# Altium PCB PCB_ADC 2.PcbDoc
Units mm, origin at the board's own origin, x right, y up, seen from the top; angles counter-clockwise.
Board outline 50.55 x 47.88 mm, 2 copper layers (Top Layer, Bottom Layer); 22 components, 14 nets, 52 pads, 0 vias.
Unrouted connection lines stored in the file: 38.
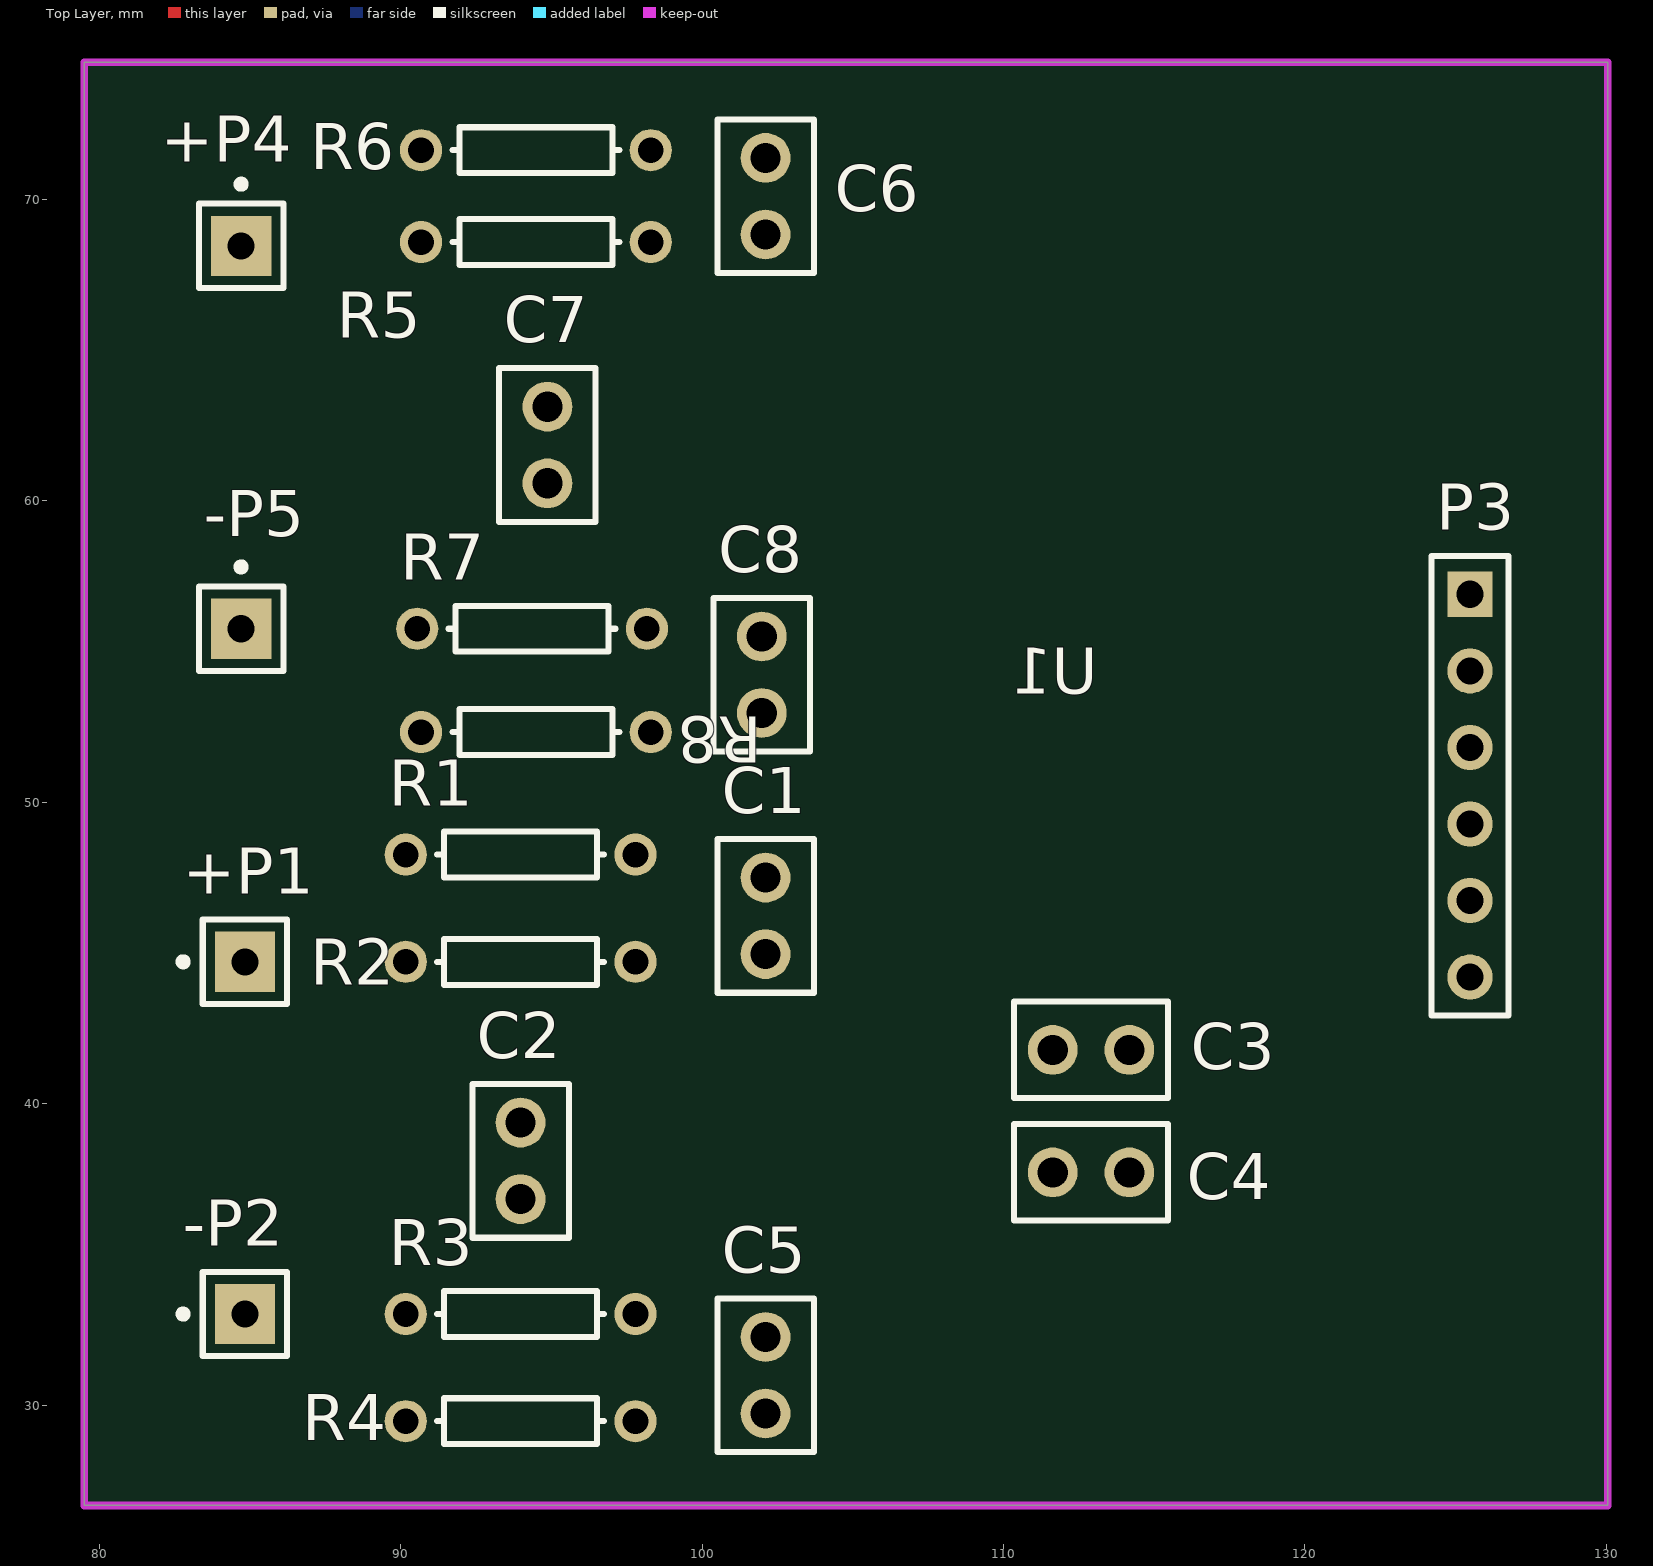
[diagram p0: Top Layer view]
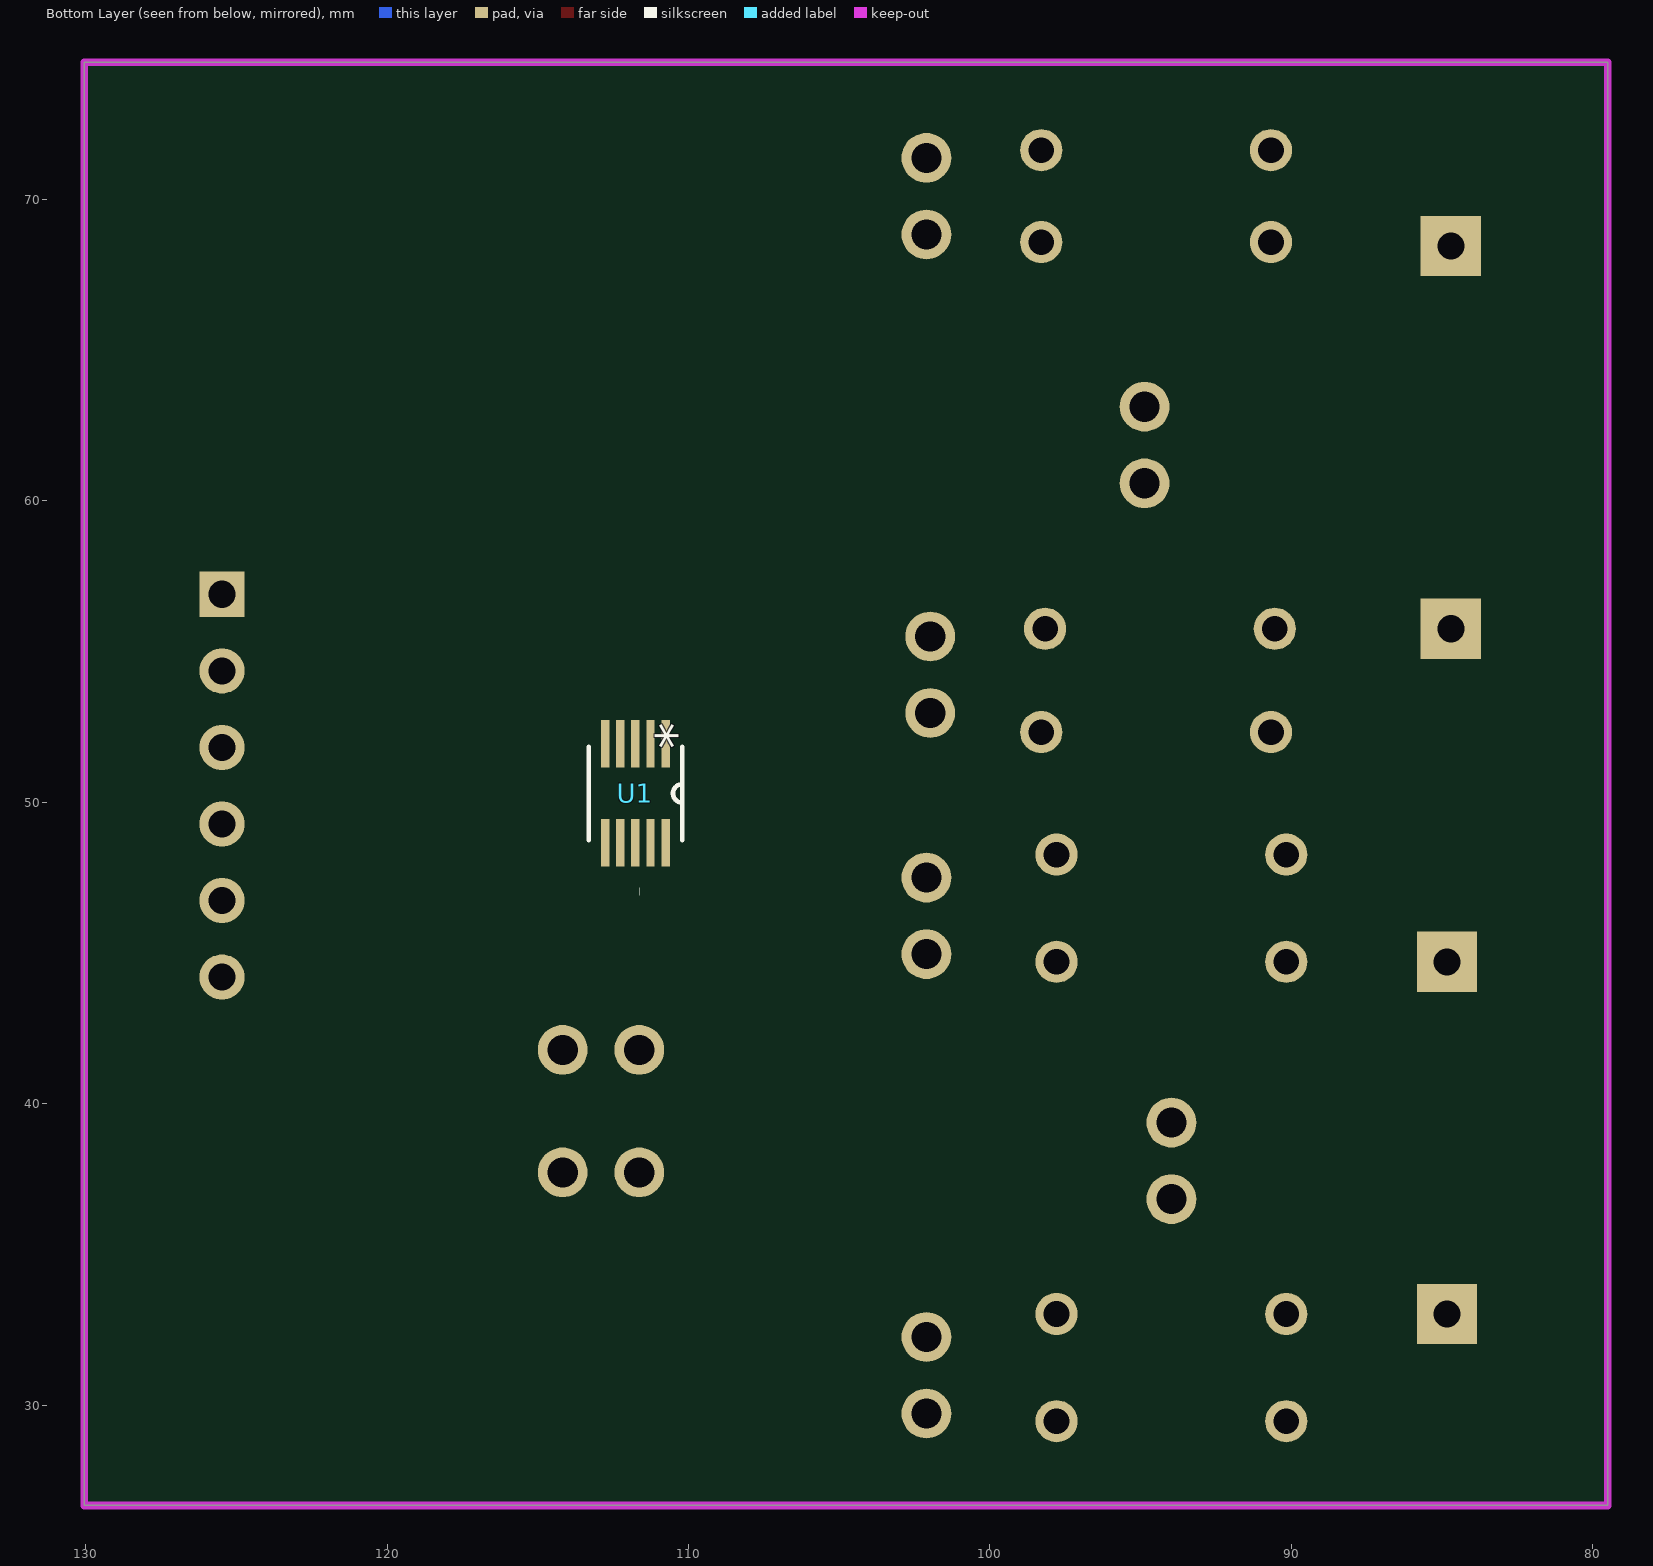
[diagram p1: Bottom Layer view, seen from below]

## Layer stack, top to bottom
Top Layer: signal copper 0.0356
Dielectric: dielectric 0.32, FR-4, Dk 4.8
Bottom Layer: signal copper 0.0356

## Board outline
79.502,26.67 79.502,74.549 130.048,74.549 130.048,26.67

## Design rules (kind name [scope] priority, off if disabled: settings)
Clearance [All] p1: gap=0.2
PolygonConnect [All] p1: connectstyle=Relief reliefconductorwidth=0.254 reliefentries=4 polygonreliefangle="90 Angle"
RoomDefinition EsquematicoAD [InComponentClass('EsquematicoAD')] p1: confinementstyle=ConfineIn formatcopy=TRUE lockcomponents=FALSE outline 178.943,24.384 290.83,24.384 290.83,42.672 178.943,42.672
RoutingVias [All] p1: holewidth=0.711 width=1.27 viastyle="Through Hole" minholewidth=0.711 minwidth=1.27 maxholewidth=0.711 maxwidth=1.27
SMDNeckDown [All] p1: percent=100.000
SilkscreenOverComponentPads [All] p1: minsilkscreentomaskgap=0.254
SolderMaskExpansion [All] p1: expansion=0.102
Width [All] p1: maxlimit=0.7 minlimit=0.3 preferedwidth=0.4 toplayer_maxwidth=0.5 minimp=50.000000 maximp=50.000000 favimp=50.000000
27 further rules are at their usual default settings.

## Components (designator, comment, footprint, x,y, rotation, side; value= is the part's Value field where it differs from the comment)
+P1 "Plug" PIN1 84.836,44.704 r90 top
+P4 "Plug" PIN1 84.709,68.453 r0 top
-P2 "Plug" PIN1 84.836,33.02 r90 top
-P5 "Plug" PIN1 84.709,55.753 r0 top
C1 "Cap" CAPR2.54-5.1x3.2 102.108,46.228 r90 top
C2 "Cap" CAPR2.54-5.1x3.2 93.98,38.1 r90 top
C3 "Cap" CAPR2.54-5.1x3.2 112.903,41.783 r180 top
C4 "Cap" CAPR2.54-5.1x3.2 112.903,37.719 r180 top
C5 "Cap" CAPR2.54-5.1x3.2 102.108,30.988 r90 top
C6 "Cap" CAPR2.54-5.1x3.2 102.108,70.104 r270 top
C7 "Cap" CAPR2.54-5.1x3.2 94.869,61.849 r90 top
C8 "Cap" CAPR2.54-5.1x3.2 101.981,54.229 r90 top
P3 "Header 6" HDR1X6 125.476,56.896 r270 top
R1 "Res1" AXIAL-0.3 93.98,48.26 r0 top
R2 "Res1" AXIAL-0.3 93.98,44.704 r180 top
R3 "Res1" AXIAL-0.3 93.98,33.02 r180 top
R4 "Res1" AXIAL-0.3 93.98,29.464 r0 top
R5 "Res1" AXIAL-0.3 94.488,68.58 r0 top
R6 "Res1" AXIAL-0.3 94.488,71.628 r180 top
R7 "Res1" AXIAL-0.3 94.361,55.753 r180 top
R8 "Res1" AXIAL-0.3 94.488,52.324 r0 top
U1 "ADS1118_DGS_10" DGS10 111.76,50.292 r270 bottom

## Footprints (in the part's own frame and the unit in brackets; to place one, negate y for a bottom-side part, rotate by r counter-clockwise, add the part's x,y. Pads: shape width x height; smd on the part's side, far side on the other; paste and mask are expansions set on the pad)
AXIAL-0.3 [mm] "Axial Device, Thru-Hole; 2 Leads; 0.3 in Pin Spacing"
  round 1.4 hole 0.85: 1(-3.81,0) 2(3.81,0)
  silkscreen extent -2.77,-0.76 2.77,0.76
CAPR2.54-5.1x3.2 [mm] "Capacitor, Ceramic, Thru-Hole, Dipped Radial; Body 5.1 x 3.2 mm (WxT) Pin Spacing 2.54 mm (typ)"
  round 1.65 hole 1: 1(-1.27,0) 2(1.27,0)
  silkscreen extent -2.55,-1.6 2.55,1.6
DGS10 [mil]
  rect 62x11 smd: 1(-64.76,39.37) 2(-64.76,19.68) 3(-64.76,0) 4(-64.76,-19.69) 5(-64.76,-39.37) 6(64.57,-39.37) 7(64.57,-19.69) 8(64.57,0) 9(64.57,19.68) 10(64.57,39.37)
  silkscreen extent -61,-61 133,61, body extent -61,-61 61,61, height 59
HDR1X6 [mm] "Connector; Header; 6 Position"
  rect 1.5x1.5 hole 0.9: 1(0,0)
  round 1.5 hole 0.9: 2(2.54,0) 3(5.08,0) 4(7.62,0) 5(10.16,0) 6(12.7,0)
  silkscreen extent -1.27,-1.27 13.97,1.27
PIN1 [mm] "Connector; Plug"
  rect 2x2 hole 0.9: 1(0,0)
  silkscreen extent -1.4,-1.4 1.4,2.17

## Part data
C1 C2 C3 C4 C5 C6 C7 C8: "Capacitor"
P3: "Header, 6-Pin"
R1 R2 R3 R4 R5 R6 R7 R8: "Resistor"
U1: "Imported"

## Nets (pads, with @x,y where several pads share a name; then routed paths per layer and width w, separated by ;. In a path a pad name is that pad's centre, name@x,y a point inside that pad or via, vN(x,y) a via of type N, cw(c..) or ccw(c..) an arc to the next point about the centre after c; other vN are vias at no path point)
GND: C1.2 C3.1 C4.1 C5.1 C6.2 C8.1 P3.6 R4.2 R8.2 U1.3
Net+P1_1: +P1.1 R1.1 R2.2
Net+P4_1: +P4.1 R5.1 R6.2
Net-P2_1: -P2.1 R3.2 R4.1
Net-P5_1: -P5.1 R7.2 R8.1
NetC1_1: C1.1 C2.2 R2.1 U1.6
NetC2_1: C2.1 C5.2 R3.1 U1.7
NetC6_1: C6.1 C7.2 R6.1 U1.4
NetC7_1: C7.1 C8.2 R7.1 U1.5
NetP3_1: P3.1 U1.2
NetP3_2: P3.2 U1.9
NetP3_3: P3.3 U1.10
NetP3_5: P3.5 U1.1
VCC: C3.2 C4.2 P3.4 R1.2 R5.2 U1.8

## Keep-outs
Keep-Out Layer:
  the board outline again, w0.254

## Text inside footprints (layer, text, board x,y; h text height)
U1: Mechanical 1 "*" at 111.633,52.629 h1.27 r90; Bottom Overlay "*" at 111.633,52.629 h1.27 r90